# Altium PCB RPI 3.PcbDoc
Units mil, origin at the board's own origin, x right, y up, seen from the top; angles counter-clockwise.
Board outline 2558.74 x 2204.72 mil, 2 copper layers (Top Layer, Bottom Layer), stack 61.2 mil thick; 2 components, 10 nets, 58 pads, 3 vias.
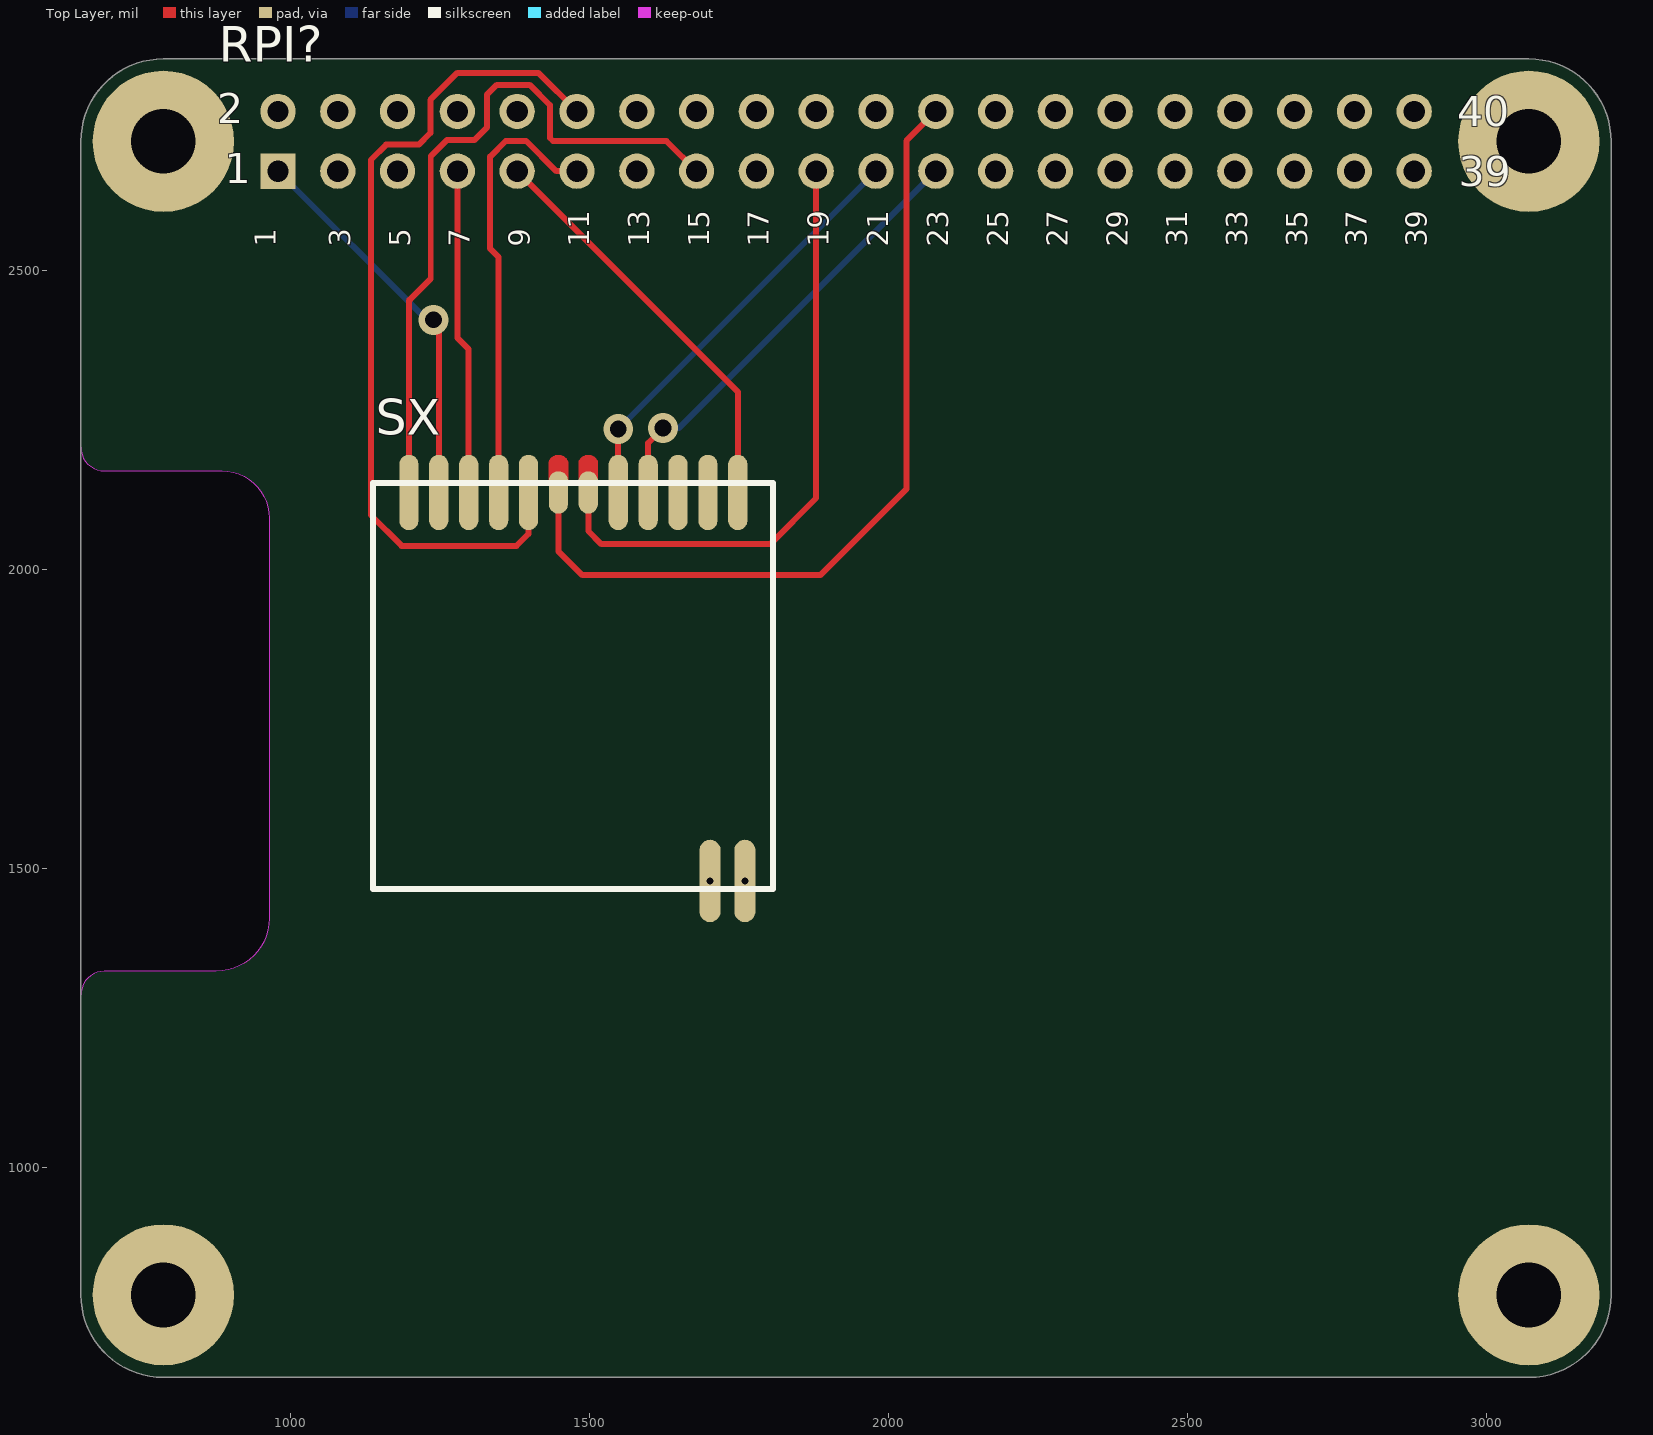
[diagram p0: Top Layer view]
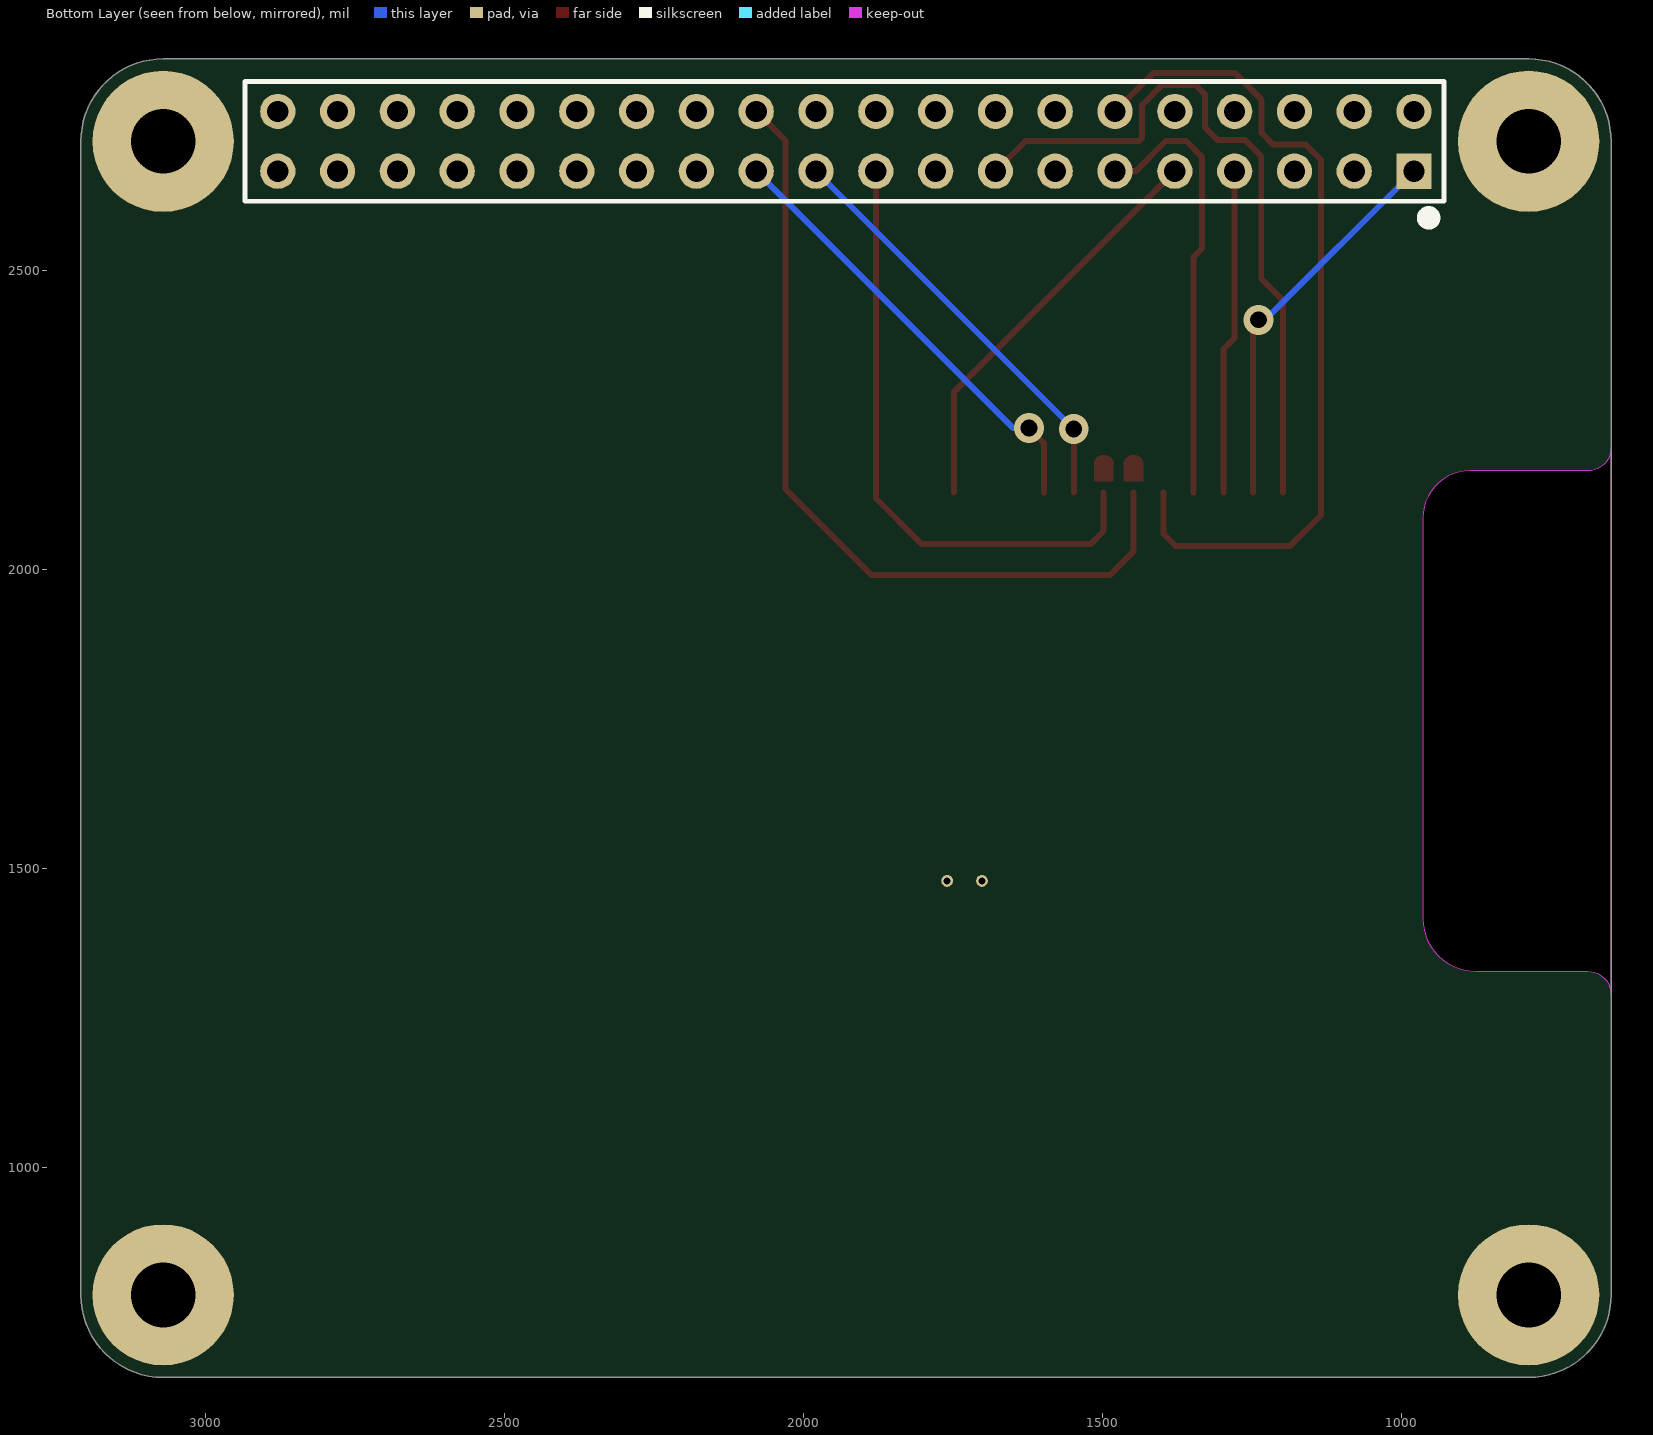
[diagram p1: Bottom Layer view, seen from below]

## Layer stack, top to bottom
Top Solder: solder mask 0.8, Solder Resist, Dk 3.5
Top Layer: signal copper 2.1
Dielectric 1: dielectric 57, FR-4, Dk 4.6
Bottom Layer: signal copper 2.1
Bottom Solder: solder mask 0.8, Solder Resist, Dk 3.5

## Board outline
649.61,787.4 ccw(c787.4,787.4) 787.4,649.61 3070.87,649.61 ccw(c3070.71,787.24) 3208.35,787.4 3208.35,2716.54 ccw(c3070.71,2716.69) 3070.87,2854.33 787.4,2854.33 ccw(c787.4,2716.54) 649.61,2716.54
cut-out: 649.61,1289.37 649.61,2204.72 ccw(c688.98,2204.72) 688.98,2165.35 885.83,2165.35 cw(c885.83,2086.61) 964.57,2086.61 964.57,1417.32 cw(c875.99,1417.32) 875.98,1328.74 688.98,1328.74 ccw(c688.97,1289.37)

## Design rules (kind name [scope] priority, off if disabled: settings)
Clearance [All] p1: gap=10 ignorepadtopadclearanceinfootprint=FALSE except(0: Arc-Hole Track-Hole SMDPad-Hole THPad-Hole Via-Hole Fill-Hole Poly-Hole Region-Hole Text-Hole)
PolygonConnect [All] p1: connectstyle=Relief reliefconductorwidth=10 reliefentries=4 polygonreliefangle="90 Angle" airgapwidth=10
RoutingVias [All] p1: holewidth=28 width=50 viastyle="Through Hole" minholewidth=28 minwidth=50 maxholewidth=28 maxwidth=50
SolderMaskExpansion [All] p1: expansion=4
Width [All] p1: maxlimit=10 minlimit=10 preferedwidth=10
30 further rules are at their usual default settings.

## Components (designator, comment, footprint, x,y, rotation, side; value= is the part's Value field where it differs from the comment)
RPI? "RPI GPIO Connector" rpi 1929.13,2716.53 r180 top locked
SX "SX1276" PCBComponent_1 1437.01,1801.18 r270 top

## Footprints (in the part's own frame and the unit in brackets; to place one, negate y for a bottom-side part, rotate by r counter-clockwise, add the part's x,y. Pads: shape width x height; smd on the part's side, far side on the other; paste and mask are expansions set on the pad)
PCBComponent_1 [mm]
  oval 3.2x0.82 smd: 1(-8.336,7.901) 2(-8.336,6.631) 3(-8.336,5.361) 4(-8.336,4.091) 5(-8.336,2.821) 8(-8.336,-0.989) 9(-8.336,-2.259) 10(-8.336,-3.529) 11(-8.336,-4.799) 12(-8.336,-6.069)
  oval 1.8x0.82 smd: 6(-8.336,1.551) 7(-8.336,0.281)
  oval 3.5x0.9 / inner round 0 / far side round 0.5 hole 0.3: 13(8.164,6.721) 14(8.164,8.201)
  Top Layer region: -8.806,0.691 -9.646,0.691 -9.676,0.678 -9.705,0.662 -9.733,0.645 -9.76,0.625 -9.785,0.604 -9.808,0.581 -9.83,0.556 -9.849,0.529 -9.867,0.501 -9.882,0.472 -9.895,0.442 -9.906,0.411 -9.915,0.379 -9.921,0.347 -9.924,0.314 -9.926,0.281 -9.924,0.248 -9.921,0.215 -9.915,0.183 -9.906,0.151 -9.895,0.12 -9.882,0.09 -9.867,0.061 -9.849,0.033 -9.829,0.006 -9.808,-0.019 -9.785,-0.042 -9.76,-0.063 -9.733,-0.083 -9.705,-0.101 -9.676,-0.116 -9.646,-0.129 -8.806,-0.129 -8.806,0.691
  Top Layer region: -8.806,1.961 -9.646,1.961 -9.676,1.948 -9.705,1.932 -9.733,1.915 -9.76,1.895 -9.785,1.874 -9.808,1.851 -9.83,1.826 -9.849,1.799 -9.867,1.771 -9.882,1.742 -9.895,1.712 -9.906,1.681 -9.915,1.649 -9.921,1.617 -9.924,1.584 -9.926,1.551 -9.924,1.518 -9.921,1.485 -9.915,1.453 -9.906,1.421 -9.895,1.39 -9.882,1.36 -9.867,1.331 -9.849,1.303 -9.829,1.276 -9.808,1.251 -9.785,1.228 -9.76,1.207 -9.733,1.187 -9.705,1.169 -9.676,1.154 -9.646,1.141 -8.806,1.141 -8.806,1.961
  silkscreen extent -8.74,-7.6 8.5,9.4
rpi [mm]
  rect 1.5x1.5 hole 0.9: 1(24.13,1.27)
  round 1.5 hole 0.9: 2(24.13,-1.27) 3(21.59,1.27) 4(21.59,-1.27) 5(19.05,1.27) 6(19.05,-1.27) 7(16.51,1.27) 8(16.51,-1.27) 9(13.97,1.27) 10(13.97,-1.27) 11(11.43,1.27) 12(11.43,-1.27) 13(8.89,1.27) 14(8.89,-1.27) 15(6.35,1.27) 16(6.35,-1.27) 17(3.81,1.27) 18(3.81,-1.27) 19(1.27,1.27) 20(1.27,-1.27) 21(-1.27,1.27) 22(-1.27,-1.27) 23(-3.81,1.27) 24(-3.81,-1.27) 25(-6.35,1.27) 26(-6.35,-1.27) 27(-8.89,1.27) 28(-8.89,-1.27) 29(-11.43,1.27) 30(-11.43,-1.27) 31(-13.97,1.27) 32(-13.97,-1.27) 33(-16.51,1.27) 34(-16.51,-1.27) 35(-19.05,1.27) 36(-19.05,-1.27) 37(-21.59,1.27) 38(-21.59,-1.27) 39(-24.13,1.27) 40(-24.13,-1.27)
  body extent -25.52,-2.63 25.53,2.38, height 8.5

## Part data
RPI?: library part "rpi connector", "GPIO Header for Raspberry Pi A+/B+/Pi 2/Pi 3 - 2x20", Manufacturer="SparkFun Electronics", Manufacturer Part Number=PRT-14017, Supplier Part Number 1=1568-1462-ND, Accessory Type=Connector, Category="Development Boards, Kits, Programmers", ComponentLink1Description=https://cdn.sparkfun.com/datasheets/Dev/RaspberryPi/12313.pdf, ComponentLink1URL=https://cdn.sparkfun.com/datasheets/Dev/RaspberryPi/12313.pdf, For Use With/Related Products="Raspberry Pi", Nils Minor=author, nilsminor@web.de=mail, Part Status=Active, Pricing 1="1=1.84 (EUR)", RoHS="RoHS Compliant", Stock 1=150, Supplier 1=Digi-Key
SX: library part Lora1276, "G-NICERF 1276"

## Free pads (board coordinates)
  round 236.22 hole 108.27: ""(787.4,787.4) ""(787.4,2716.54) ""(3070.87,787.4) ""(3070.87,2716.54)

## Via types
v1: diameter 50, hole 28, Top Layer to Bottom Layer, 3 vias

## Nets (pads, with @x,y where several pads share a name; then routed paths per layer and width w, separated by ;. In a path a pad name is that pad's centre, name@x,y a point inside that pad or via, vN(x,y) a via of type N, cw(c..) or ccw(c..) an arc to the next point about the centre after c; other vN are vias at no path point)
3V3: RPI?.1 SX.11 | length 655.2
  Top Layer w10: v1(1239,2418.07) 1248.07,2409 SX.11
  Bottom Layer w10: RPI?.1 1227.6,2418.07 v1(1239,2418.07)
DIO0: RPI?.7 SX.10 | length 545
  Top Layer w10: RPI?.7 1279.13,2387.94 1298.07,2369 SX.10
DIO1: RPI?.11 SX.9 | length 744.3
  Top Layer w10: SX.9 1348.07,2522.93 1334,2537 1334,2691 1360,2717 1394.14,2717 1444.61,2666.54 RPI?.11
DIO2: RPI?.12 SX.8 | length 1420.7
  Top Layer w10: SX.8 1398.07,2060 1378.07,2040 1186,2040 1134.61,2091.39 1134.61,2685.67 1160,2711.06 1214.61,2711.06 1234,2730.46 1234,2786 1279.06,2831.06 1414.61,2831.06 RPI?.12
GND: RPI?.9 SX.1 | length 690
  Top Layer w10: RPI?.9 1748.07,2297.6 SX.1
MISO: RPI?.21 SX.5 | length 715.7
  Top Layer w10: SX.5 v1(1548.07,2235.47)
  Bottom Layer w10: v1(1548.07,2235.47) RPI?.21
MOSI: RPI?.19 SX.6 | length 1032.9
  Top Layer w10: SX.6 1498.07,2064.99 1520,2043.06 1802.2,2043.06 1879.13,2120 RPI?.19
NRESET: RPI?.15 SX.12 | length 1195.7
  Top Layer w10: SX.12 1198.07,2450.07 1234.61,2486.61 1234.61,2691.61 1262,2719 1308,2719 1329,2740 1329,2795 1345.06,2811.06 1400,2811.06 1434,2777.06 1434,2722 1439,2717 1628.67,2717 RPI?.15
NSS: RPI?.24 SX.7 | length 1408.4
  Top Layer w10: SX.7 1448.07,2030.93 1488,1991 1886,1991 2030,2135 2030,2717.4 RPI?.24
SCK: RPI?.23 SX.4 | length 752
  Top Layer w10: SX.4 1598.07,2212 v1(1623.07,2237)
  Bottom Layer w10: v1(1623.07,2237) 1649.6,2237 RPI?.23
pads on no net: RPI?.2 RPI?.3 RPI?.4 RPI?.5 RPI?.6 RPI?.8 RPI?.10 RPI?.13 RPI?.14 RPI?.16 RPI?.17 RPI?.18 RPI?.20 RPI?.22 RPI?.25 RPI?.26 RPI?.27 RPI?.28 RPI?.29 RPI?.30 RPI?.31 RPI?.32 RPI?.33 RPI?.34 RPI?.35 RPI?.36 RPI?.37 RPI?.38 RPI?.39 RPI?.40 SX.2 SX.3 SX.13 SX.14

## Silkscreen, mask and mechanical layers (free items; w line width, h text height)
Top Overlay:
  text "1" at 975,2540.16 h35 r90
  text "3" at 1100,2540.16 h35 r90
  text "5" at 1200,2540.16 h35 r90
  text "7" at 1300,2540.16 h35 r90
  text "9" at 1400,2540.16 h35 r90
  text "11" at 1500,2540.16 h35 r90
  text "13" at 1600,2540.16 h35 r90
  text "15" at 1700,2540.16 h35 r90
  text "17" at 1800,2540.16 h35 r90
  text "19" at 1900,2540.16 h35 r90
  text "21" at 2000,2540.16 h35 r90
  text "23" at 2100,2540.16 h35 r90
  text "25" at 2200,2540.16 h35 r90
  text "27" at 2300,2540.16 h35 r90
  text "29" at 2400,2540.16 h35 r90
  text "31" at 2500,2540.16 h35 r90
  text "33" at 2600,2540.16 h35 r90
  text "35" at 2700,2540.16 h35 r90
  text "37" at 2800,2540.16 h35 r90
  text "39" at 2900,2540.16 h35 r90
Bottom Overlay:
  circle w19.68: c954.72,2588.58 r9.84
M2: Outline:
  the board outline again, w10

## Dimensions
787.4,2716.54 to 979.13,2666.54 on Top Layer
979.13,2666.54 to 787.4,2716.54 on Top Layer

## Text inside footprints (layer, text, board x,y; h text height)
RPI?: Top Overlay "2" at 877.95,2747.05 h50; Top Overlay "1" at 889.76,2646.65 h50; Top Overlay "39" at 2953.74,2641.73 h50; Top Overlay "40" at 2950.79,2742.13 h50